# EAGLE board ccd_driver (EAGLE 9.0.1)
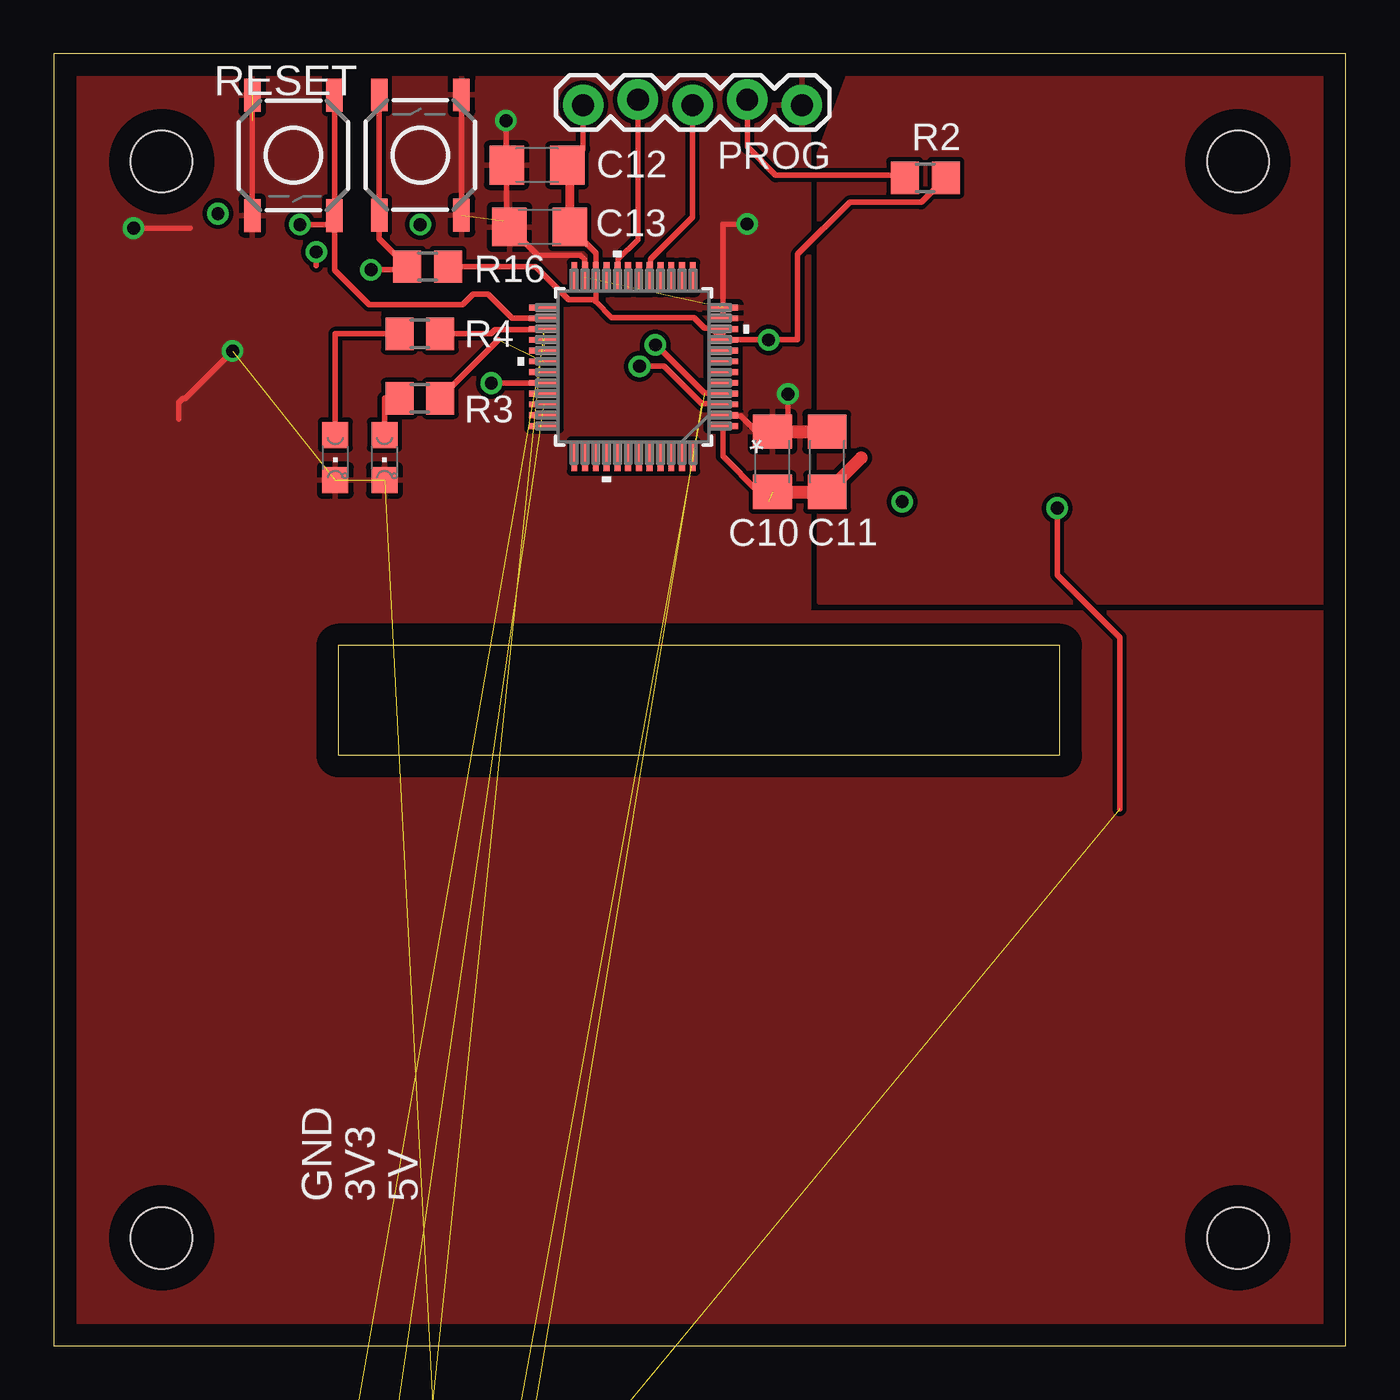
[diagram p0: board, top side]
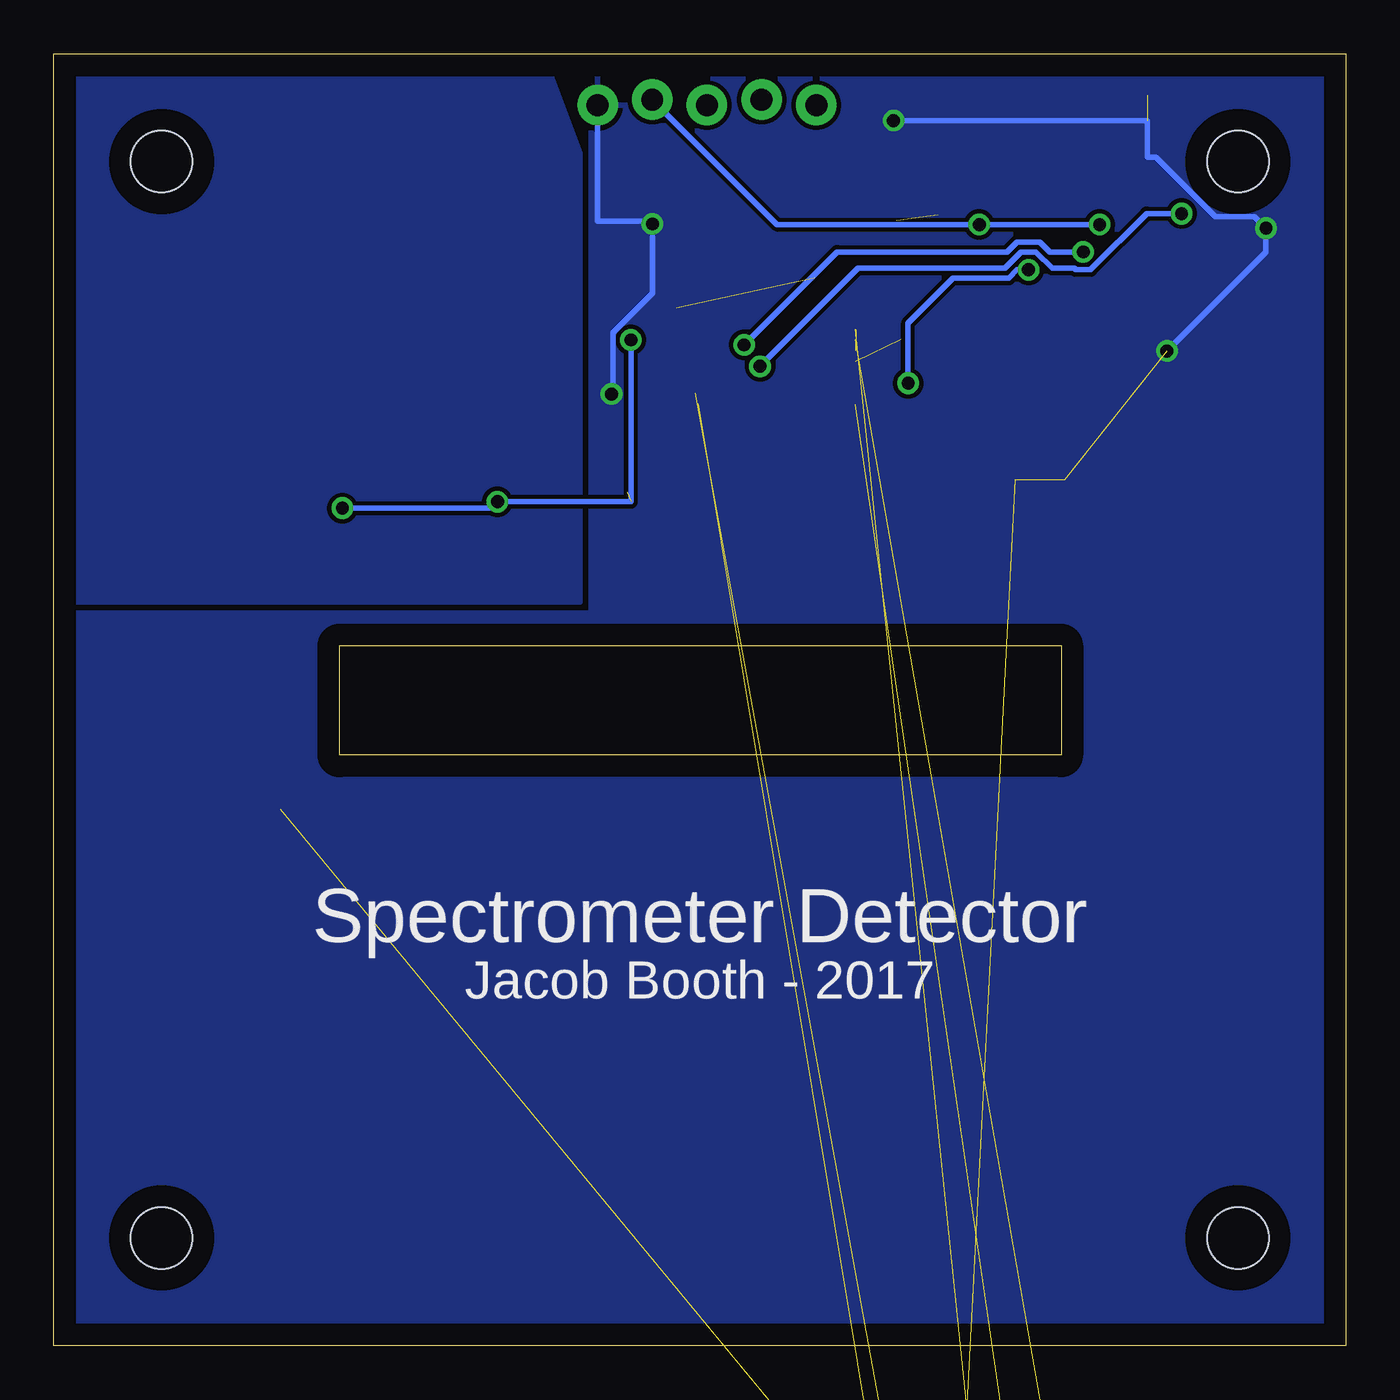
[diagram p1: board, bottom side, seen from below]

Size 60 x 60 mm. Coordinates in mm from the lower left corner, seen from the top.
Outline: 0,0 60,0 60,60 0,60 0,0
Outline: 13.21,32.51 13.21,27.43 46.74,27.43 46.74,32.51 13.21,32.51
Copper layers (1*16): Top 0.035mm / dielectric 1.5mm / Bottom 0.035mm
Design rules "default": minimum track width 10mil, minimum drill 24mil, track to track 8mil, track to pad 8mil, pad to pad 8mil, via to via 8mil, smd to smd 8mil, copper to edge 40mil, drill to drill 8mil, minimum pad ring 10mil, minimum via ring 8mil, stop-mask expansion 4mil, vias tented up to drill 0mil, thermal gap 10mil
Net classes: 1 data: width 0.152 mm; 2 power: width 0.508 mm, drill 0.305 mm, clearance 0.203 mm; 3 power2: width 0.254 mm
Holes 2.84 mm at 5,55 55,55 55,5 5,5
tKeepout: area 2.2,52.2 to 7.8,57.8; area 52.2,52.2 to 57.8,57.8; area 52.2,2.2 to 57.8,7.8; area 2.2,2.2 to 7.8,7.8

## Footprints (pad centres in the part's own frame; a part is rotated, then mirrored left to right if it is on the bottom)
C1206 = smd 1.6 x 1.8: 1 -1.4,0; 2 1.4,0
SSOP28 = smd 0.4 x 1.5: 1 -4.225,-3.625; 2 -3.575,-3.625; 3 -2.925,-3.625; 4 -2.275,-3.625; 5 -1.625,-3.625; 6 -0.975,-3.625; 7 -0.325,-3.625; 8 0.325,-3.625; 9 0.975,-3.625; 10 1.625,-3.625; 11 2.275,-3.625; 12 2.925,-3.625; 13 3.575,-3.625; 14 4.225,-3.625; 15 4.225,3.625; 16 3.575,3.625; 17 2.925,3.625; 18 2.275,3.625; 19 1.625,3.625; 20 0.975,3.625; 21 0.325,3.625; 22 -0.325,3.625; 23 -0.975,3.625; 24 -1.625,3.625; 25 -2.275,3.625; 26 -2.925,3.625; 27 -3.575,3.625; 28 -4.225,3.625
USB-MINIB = smd 2.5 x 0.5: D+ 2.5,0; D- 2.5,0.8; GND 2.5,-1.6; ID 2.5,-0.8; VBUS 2.5,1.6 | smd 2.5 x 2: MTN1 -3,4.5; MTN2 2.5,4.5; MTN3 -3,-4.5; MTN4 2.5,-4.5 | hole 0.9: 0,2.2; 0,-2.2
CHIPLED_0805 = smd 1.2 x 1.2: A 0,-1.05; C 0,1.05
1X05_LOCK = drill 1.016 pad 1.88: 1 0,0.127; 2 2.54,-0.127; 3 5.08,0.127; 4 7.62,-0.127; 5 10.16,0.127
TO92 = drill 0.813 octagon: 1 1.27,0; 2 0,1.905; 3 -1.27,0
R0805 = smd 1.3 x 1.5: 1 -0.95,0; 2 0.95,0
TACTILE-SWITCH-SMD = smd 1.524 x 0.762: 1 -2.794,1.905; 2 2.794,1.905; 3 -2.794,-1.905; 4 2.794,-1.905
P1-17Y = drill 1.702 pad 2.121 long: TP 0,0
LQFP-48_7X7X1.6 = smd 1.411 x 0.27: 1 -4.15,2.75; 2 -4.15,2.25; 3 -4.15,1.75; 4 -4.15,1.25; 5 -4.15,0.75; 6 -4.15,0.25; 7 -4.15,-0.25; 8 -4.15,-0.75; 9 -4.15,-1.25; 10 -4.15,-1.75; 11 -4.15,-2.25; 12 -4.15,-2.75; 25 4.15,-2.75; 26 4.15,-2.25; 27 4.15,-1.75; 28 4.15,-1.25; 29 4.15,-0.75; 30 4.15,-0.25; 31 4.15,0.25; 32 4.15,0.75; 33 4.15,1.25; 34 4.15,1.75; 35 4.15,2.25; 36 4.15,2.75 | smd 0.27 x 1.411: 13 -2.75,-4.15; 14 -2.25,-4.15; 15 -1.75,-4.15; 16 -1.25,-4.15; 17 -0.75,-4.15; 18 -0.25,-4.15; 19 0.25,-4.15; 20 0.75,-4.15; 21 1.25,-4.15; 22 1.75,-4.15; 23 2.25,-4.15; 24 2.75,-4.15; 37 2.75,4.15; 38 2.25,4.15; 39 1.75,4.15; 40 1.25,4.15; 41 0.75,4.15; 42 0.25,4.15; 43 -0.25,4.15; 44 -0.75,4.15; 45 -1.25,4.15; 46 -1.75,4.15; 47 -2.25,4.15; 48 -2.75,4.15
TO220H = drill 1.118 long: 1 -2.54,-10.16; 2 0,-10.16; 3 2.54,-10.16 | hole 3.302: 0,4.826
TCD1304 = drill 0.813 long: 1 -12.7,-5.08; 2 -10.16,-5.08; 3 -7.62,-5.08; 4 -5.08,-5.08; 5 -2.54,-5.08; 6 0,-5.08; 7 2.54,-5.08; 8 5.08,-5.08; 9 7.62,-5.08; 10 10.16,-5.08; 11 12.7,-5.08; 12 12.7,5.08; 13 10.16,5.08; 14 7.62,5.08; 15 5.08,5.08; 16 2.54,5.08; 17 0,5.08; 18 -2.54,5.08; 19 -5.08,5.08; 20 -7.62,5.08; 21 -10.16,5.08; 22 -12.7,5.08
TSOT23-6 = smd 0.62 x 1.22: 1 -0.95,-1.3; 2 0,-1.3; 3 0.95,-1.3; 4 0.95,1.3; 5 0,1.3; 6 -0.95,1.3

## Placement (x,y rotation side)
C1  0.1 µF  [C1206]  36.16,-115.52 0 top  (outside the outline)
C2  0.1 µF  [C1206]  43.04,-115.52 0 top  (outside the outline)
C3  0.1 µF  [C1206]  -0.56,-126.8 0 top  (outside the outline)
C4  0.1µF  [C1206]  -0.56,-50.64 0 top  (outside the outline)
C10  0.1 µF  [C1206]  33.38,41.05 90 top
C11  10uF  [C1206]  35.92,41.05 90 top
C12  0.1 µF  [C1206]  22.44,54.83 180 top
C13  10uF  [C1206]  22.57,51.96 180 top
C15  10uF  [C1206]  6.32,-126.8 0 top  (outside the outline)
IC1  FT232RL  [SSOP28]  4.24,-118 0 top  (outside the outline)
J2  USB-MINIB-5PIN  [USB-MINIB]  16.64,-118 0 top  (outside the outline)
LED1  [CHIPLED_0805]  15.36,41.25 180 top
LED2  [CHIPLED_0805]  13.07,41.25 180 top
PROG  [1X05_LOCK]  34.75,57.75 180 top
Q2  BC214  [TO92]  4.8,-40.88 0 top  (outside the outline)
R1  22  [R0805]  21.84,-126.8 0 top  (outside the outline)
R2  10k  [R0805]  40.47,54.24 0 top
R3  1k  [R0805]  17,44 180 top
R4  1k  [R0805]  17,47 180 top
R9  22  [R0805]  26,-126.8 0 top  (outside the outline)
R10  1k  [R0805]  11.68,-126.8 0 top  (outside the outline)
R11  1k  [R0805]  16.8,-126.8 0 top  (outside the outline)
R16  10k  [R0805]  17.36,50.11 0 top
R20  69.8k  [R0805]  5.36,-50.64 0 top  (outside the outline)
R21  5.9k  [R0805]  29.6,-50.64 0 top  (outside the outline)
R22  11k  [R0805]  34.88,-50.64 0 top  (outside the outline)
R23  11k  [R0805]  -1.04,-56.8 0 top  (outside the outline)
R24  10.5k  [R0805]  11.6,-50.64 0 top  (outside the outline)
R25  150  [R0805]  4.08,-56.8 0 top  (outside the outline)
R26  150  [R0805]  9.2,-56.8 0 top  (outside the outline)
R27  2200  [R0805]  17.84,-50.64 0 top  (outside the outline)
R28  0  [R0805]  14.32,-56.8 0 top  (outside the outline)
R29  0  [R0805]  19.44,-56.8 0 top  (outside the outline)
R30  0  [R0805]  24.56,-56.8 0 top  (outside the outline)
RX_LED1  [CHIPLED_0805]  26.48,-119.6 0 top  (outside the outline)
S1  TAC_SWITCHSMD  [TACTILE-SWITCH-SMD]  11.13,55.28 270 top
S2  TAC_SWITCHSMD  [TACTILE-SWITCH-SMD]  17.02,55.3 90 top
TP4  TPPAD1-17Y  [P1-17Y]  31.6,-72.64 0 top  (outside the outline)
TP5  TPPAD1-17Y  [P1-17Y]  9.68,-99.6 0 top  (outside the outline)
TP6  TPPAD1-17Y  [P1-17Y]  35.28,-99.6 0 top  (outside the outline)
TX_LED1  [CHIPLED_0805]  31.6,-119.44 0 top  (outside the outline)
U2  MK02FN128VLF10  [LQFP-48_7X7X1.6]  26.92,45.47 180 top
U$1  LD1117V33  [TO220H]  7.84,-68.24 0 top  (outside the outline)
U$2  TCD1304  [TCD1304]  17.76,-20.64 0 top  (outside the outline)
U$5  LTC6252  [TSOT23-6]  28.96,-37.04 0 top  (outside the outline)

## Library data of the parts
C1-C4 C10-C13 C15 R1-R4 R9-R11 R16 R20-R30 = resistor
IC1 = ftdichip; MPN: FT232RL; OC_FARNELL: 1146032; OC_NEWARK: 91K9918
J2 = SparkFun-Connectors; PROD_ID: CONN-08193
LED1 LED2 RX_LED1 TX_LED1 = led
PROG = SparkFun-Connectors
Q2 = transistor-pnp
S1 S2 = SparkFun-Retired; PROD_ID: SWCH-08247
TP4-TP6 = testpad
U2 = MK02FN128VLF10; CPU: ARM Cortex-M4F; FLASHKB: 128; MANUFACTURER_PART_NUMBER: mk02fn128vlf10; MAXFREQUENCY: 100; PINCOUNT: 48; SRAMKB: 16; VENDOR: FREESCALE
U$1 U$2 U$5 = ccd

## Nets
3.3V: C4.1 C10.1 C11.1 C12.1 C13.1 C15.1 PROG.5 R2.2 R16.2 TP5.TP U2.1 U2.9 U2.10 U2.22 U$1.2 U$2.1 U$2.2
5V: C2.1 C3.1 IC1.19 IC1.20 J2.VBUS R20.2 R27.1 RX_LED1.A TP4.TP TX_LED1.A U$1.3 U$5.6
AGND: C4.2 R21.1 R23.1 R26.2 R29.1 U$2.6 U$2.7 U$2.8 U$2.9 U$2.10 U$2.11 U$2.12 U$2.13 U$2.14 U$2.15 U$2.16 U$2.17 U$2.18 U$2.19 U$2.20 U$2.22 U$5.2
BU1: Q2.1 R27.2 R30.1
FM: U2.34 U$2.4
GND: C1.2 C3.2 C10.2 C11.2 C12.2 C13.2 C15.2 IC1.7 IC1.18 IC1.21 IC1.25 IC1.26 J2.GND LED1.C LED2.C PROG.1 R29.2 S1.3 S1.4 S2.3 S2.4 TP6.TP U2.2 U2.11 U2.12 U2.23 U$1.1
ICG: U2.28 U$2.3
N$1: IC1.16 R1.1
N$2: IC1.15 R9.1
N$3: J2.D- R1.2
N$4: J2.D+ R9.2
N$5: C1.1 C2.2 IC1.4 IC1.17
N$6: R20.1 R21.2 R22.2 U$5.4
N$7: R16.1 S2.1 S2.2 U2.32
N$8: IC1.23 R10.1
N$9: IC1.22 R11.1
N$10: R11.2 RX_LED1.C
N$11: R3.1 U2.30
N$12: LED1.A R3.2
N$13: LED2.A R4.2
N$15: R4.1 U2.29
N$24: R10.2 TX_LED1.C
N$28: R23.2 R24.1 U$5.3
N$29: R24.2 R28.1 U$2.21
N$30: Q2.2 R25.1
N$31: Q2.3 R26.1
N$32: R25.2 R28.2
OS: R22.1 R30.2 U$5.1
PCRX: IC1.1 U2.4
PCTX: IC1.5 U2.3
RESET: PROG.2 R2.1 S1.1 S1.2 U2.26
SH: U2.27 U$2.5
SWD_CLK [data]: PROG.3 U2.17
SWD_DIO [data]: PROG.4 U2.20

## Tracks (layer width: path | path; a pad name or v marks a point on that pad's centre or on a via)
3.3V  (via drill 0.6)  (7 unrouted)
  Top 0.254: U2.10 U2.9 | C12.1 24.59,55.58 PROG.5 | C13.1 25.17,50.75 U2.22 25.17,48.49 | U2.1 31.07,41.32 32.74,39.65 C10.1 | R2.2 40.29,53.11 36.97,53.11 34.54,50.68 34.54,46.74 34.52,46.72 v33.2,46.72 U2.9 | U2.9 30.54,47.25 30.23,47.25 29.73,47.75 25.91,47.75 25.17,48.49 | 25.17,48.49 25.08,48.58 23.9,48.58 22.37,50.11 R16.2 | 49.5,24.92 49.5,32.9 46.6,35.8 v46.6,38.9 | 39.38,39.2 v39.4,39.2
  Top 0.406: C12.1 23.96,54.7 C13.1
  Top 0.61: C10.1 C11.1 37.5,41.24
  Bottom 0.254: v46.6,38.9 39.4,38.9 v39.4,39.2 33.2,39.2 v33.2,46.72
5V  (11 unrouted)
AGND  (21 unrouted)
  pour Top: 35.56,55.37 37.08,59.44 59.44,59.44 59.44,34.54 35.56,34.54
  pour Bottom: 35.56,55.37 37.08,59.44 59.44,59.44 59.44,34.54 35.56,34.54
BU1  (2 unrouted)
FM  (1 unrouted)
GND  (via drill 0.6)  (17 unrouted)
  Top 0.254: C13.2 21.04,52.08 C12.2 21,54.83 v21,56.9 | 20.87,52.25 C13.2 | S1.4 S1.3 | S2.4 S2.3 | U2.23 24.64,49.65 24.64,50.46 24.45,50.65 22.47,50.65 C13.2 | U2.11 U2.12 31.07,52.1 v32.2,52.1 | U2.2 31.11,43.18 31.92,43.18 32.64,42.45 C10.2 34.1,42.45 v34.1,44.2 | 5.79,43.03 5.79,43.8 5.99,43.99 6.09,43.99 v8.3,46.2 | v3.7,51.9 6.33,51.9
  Top 0.61: C10.2 C11.2
  Bottom 0.254: v8.3,46.2 3.7,50.8 v3.7,51.9 4.24,52.44 6.06,52.44 8.83,55.2 9.22,55.2 9.22,56.9 v21,56.9 | PROG.1 34.75,52.24 32.2,52.24 v32.2,52.1 32.2,48.9 34.03,47.06 34.03,44.27 v34.1,44.2
  pour Top: 1.02,58.93 35.05,58.93 35.05,34.04 58.93,34.04 58.93,1.02 1.02,1.02
  pour Bottom: 1.02,58.93 35.05,58.93 35.05,34.04 58.93,34.04 58.93,1.02 1.02,1.02
ICG  (1 unrouted)
N$1  (1 unrouted)
N$2  (1 unrouted)
N$3  (1 unrouted)
N$4  (1 unrouted)
N$5  (3 unrouted)
N$6  (3 unrouted)
N$7  (via drill 0.6)
  Top 0.254: S2.2 S2.1 15.12,51.41 R16.1 16.26,49.97 v14.73,49.97 | v20.32,44.7 20.33,44.72 U2.32
  Bottom 0.254: v20.32,44.7 20.32,47.5 18.24,49.58 15.65,49.58 15.26,49.97 v14.73,49.97
N$8  (1 unrouted)
N$9  (1 unrouted)
N$10  (1 unrouted)
N$11  (1 unrouted)
  Top 0.254: R3.1 20.67,46.72
N$12
  Top 0.254: LED1.A 15.36,44 R3.2
N$13
  Top 0.254: R4.2 13.07,47 LED2.A
N$15  (1 unrouted)
  Top 0.254: R4.1 20.3,47 20.48,47.18 22.74,47.18
N$24  (1 unrouted)
N$28  (2 unrouted)
N$29  (2 unrouted)
N$30  (1 unrouted)
N$31  (1 unrouted)
N$32  (1 unrouted)
OS  (2 unrouted)
PCRX  (via drill 0.6)  (1 unrouted)
  Top 0.254: U2.4 31.04,44.25 30.23,44.25 28,46.48 v27.94,46.48 | 12.19,50.16 v12.19,50.8
  Bottom 0.254: v27.94,46.48 23.62,50.8 15.72,50.8 15.27,51.26 14.2,51.26 13.74,50.8 v12.19,50.8
PCTX  (via drill 0.6)  (1 unrouted)
  Top 0.254: U2.3 31.04,43.75 30.09,43.75 28.35,45.49 v27.2,45.49 | v7.62,52.58 v7.62,52.57
  Bottom 0.254: v27.2,45.49 22.65,50.04 15.84,50.04 15.08,50.8 14.39,50.8 13.62,50.04 12.61,50.04 12.54,49.97 11.85,49.97 9.23,52.58 v7.62,52.58
RESET  (via drill 0.6)
  Top 0.254: S1.2 S1.1 | v11.43,52.07 13.03,52.07 S1.2 | R2.1 39.41,54.36 33.53,54.36 32.21,55.68 PROG.2 | U2.26 21.28,47.72 20.16,48.84 19.47,48.84 18.98,48.35 14.64,48.35 13.03,49.96 S1.2
  Bottom 0.254: v11.43,52.07 v17.02,52.07 26.4,52.07 PROG.2
SH  (1 unrouted)
SWD_CLK
  Top 0.254: U2.17 27.71,49.65 27.71,50.46 29.67,52.42 PROG.3
SWD_DIO
  Top 0.254: U2.20 26.21,49.65 26.21,50.46 27.13,51.38 PROG.4

## Text on the board
tNames: RESET | GND | 3V3 | 5V
bNames: Spectrometer Detector | Jacob Booth - 2017